# Altium PCB CruxOne_v1.2_with_silkscreen.PcbDoc
Units mm, origin at the board's own origin, x right, y up, seen from the top; angles counter-clockwise.
Board outline 45 x 20 mm, 4 copper layers (Top Layer, Mid-Layer 2, Mid-Layer 3, Bottom Layer); 87 components, 58 nets, 254 pads, 538 vias.
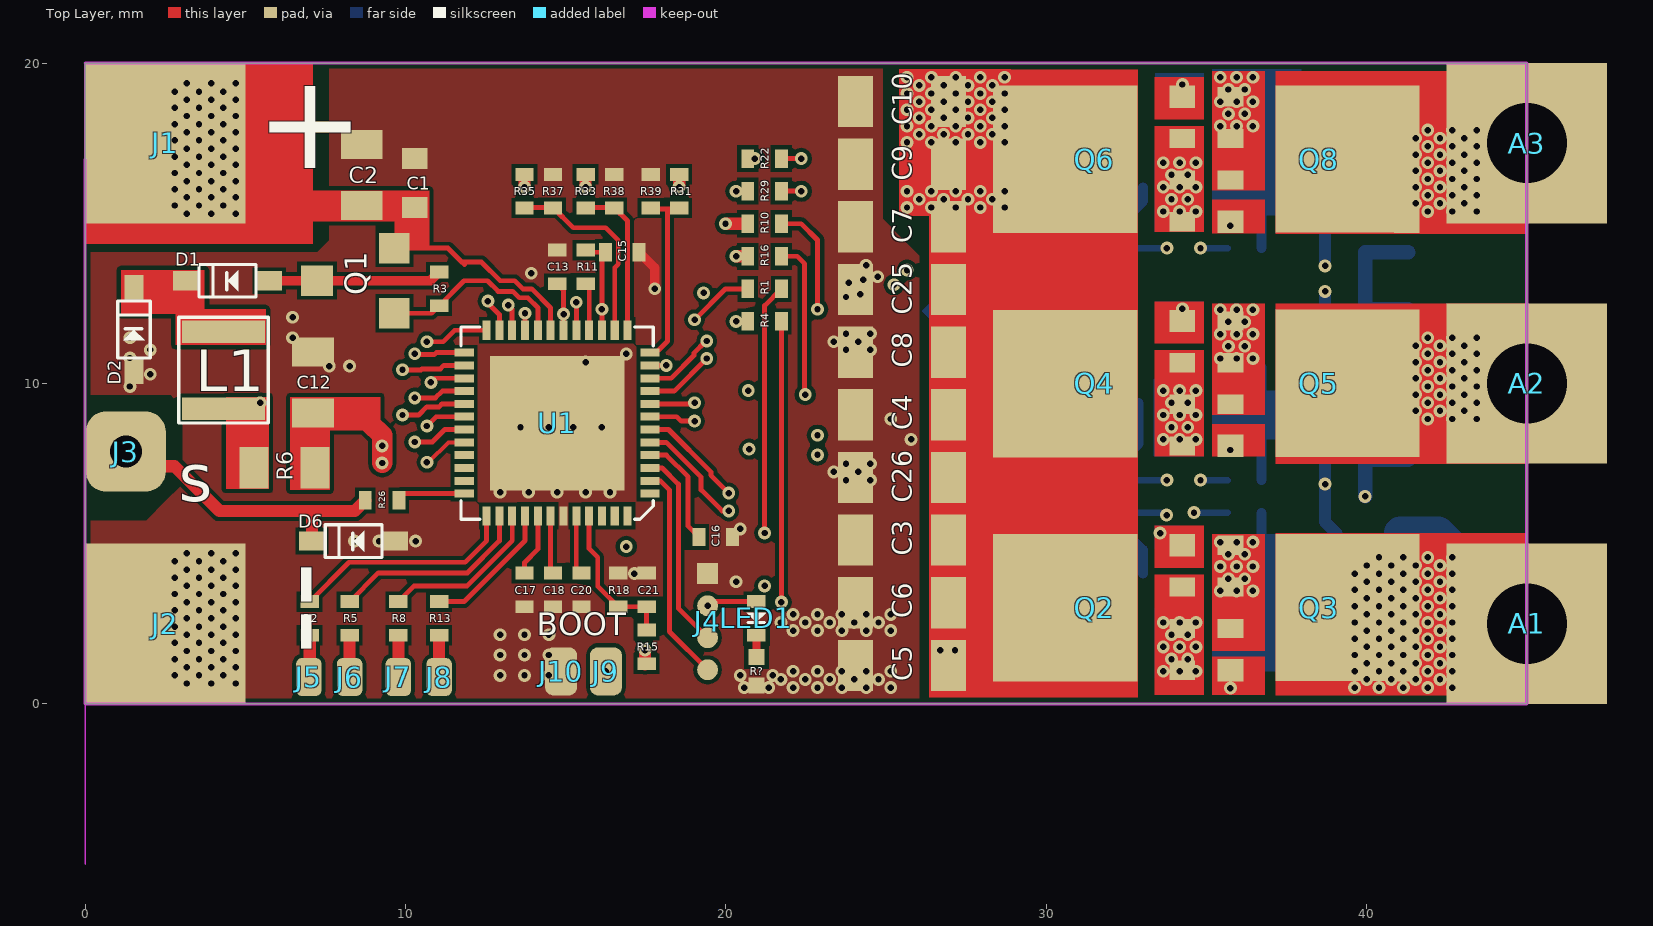
[diagram p0: Top Layer view]
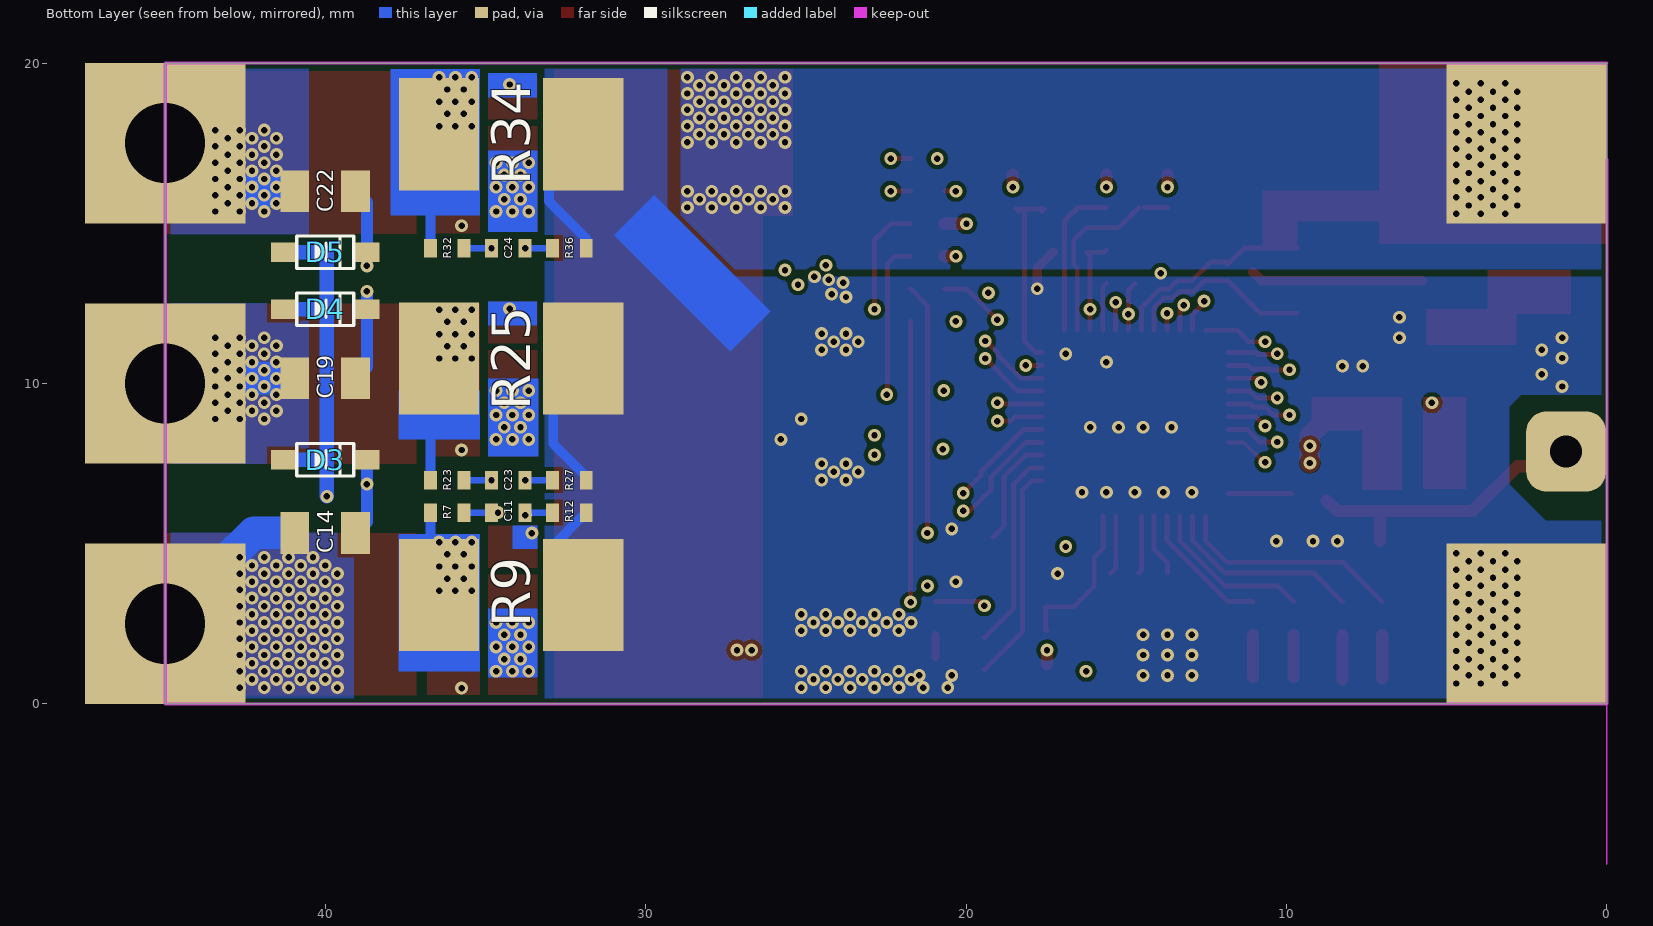
[diagram p1: Bottom Layer view, seen from below]
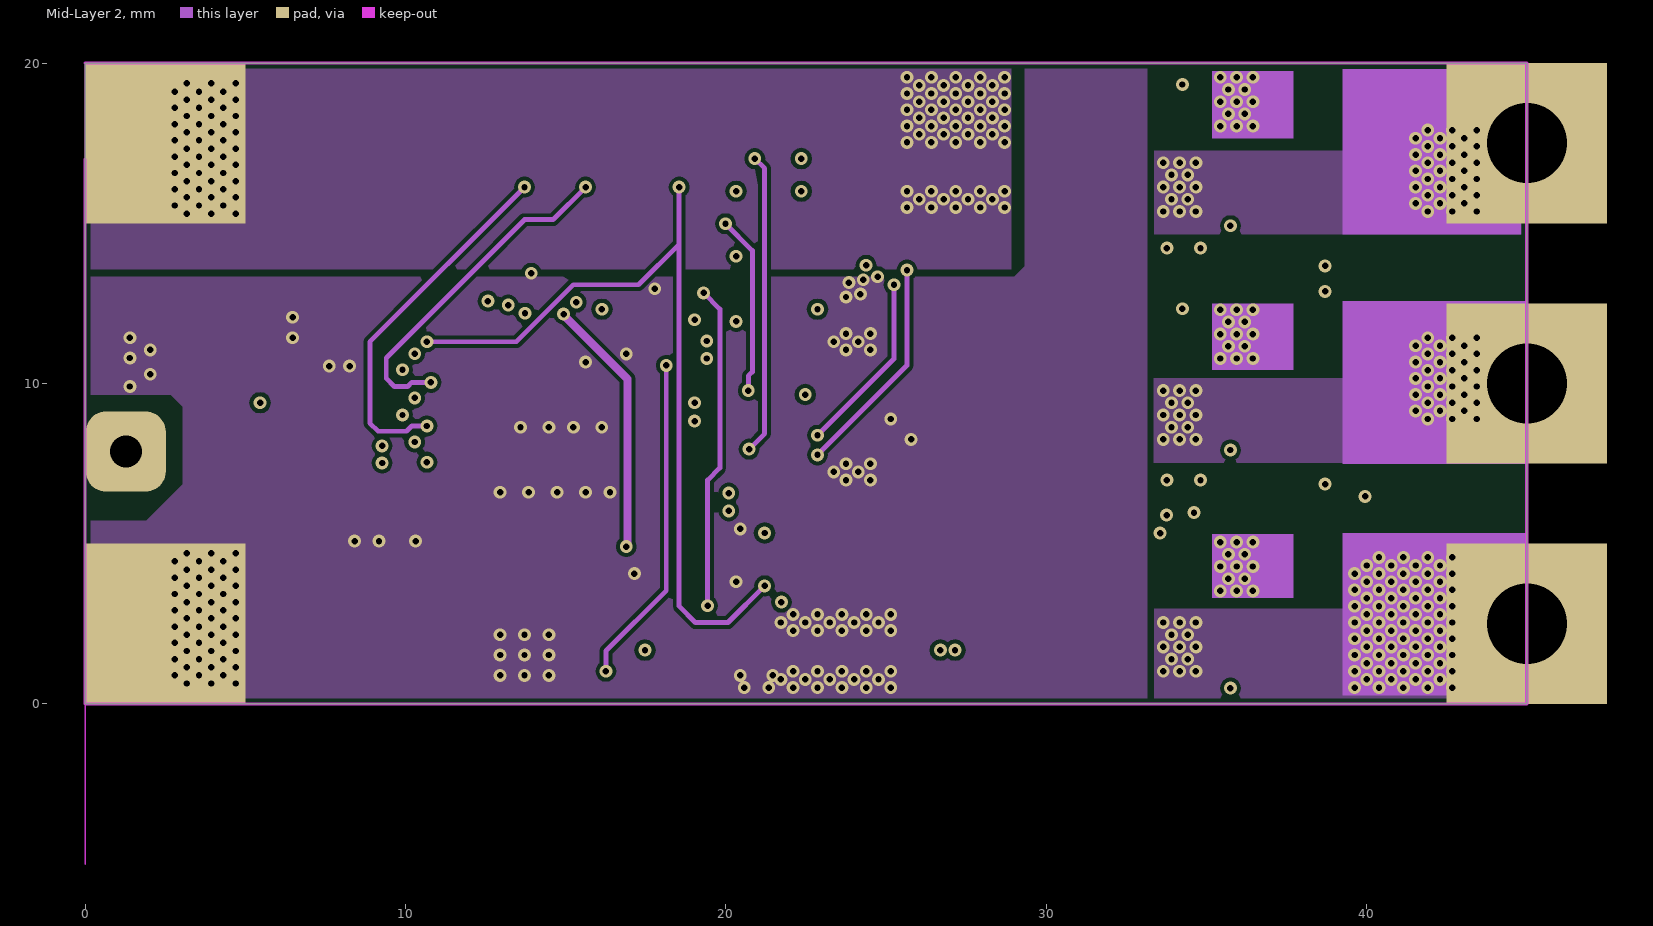
[diagram p2: Mid-Layer 2]
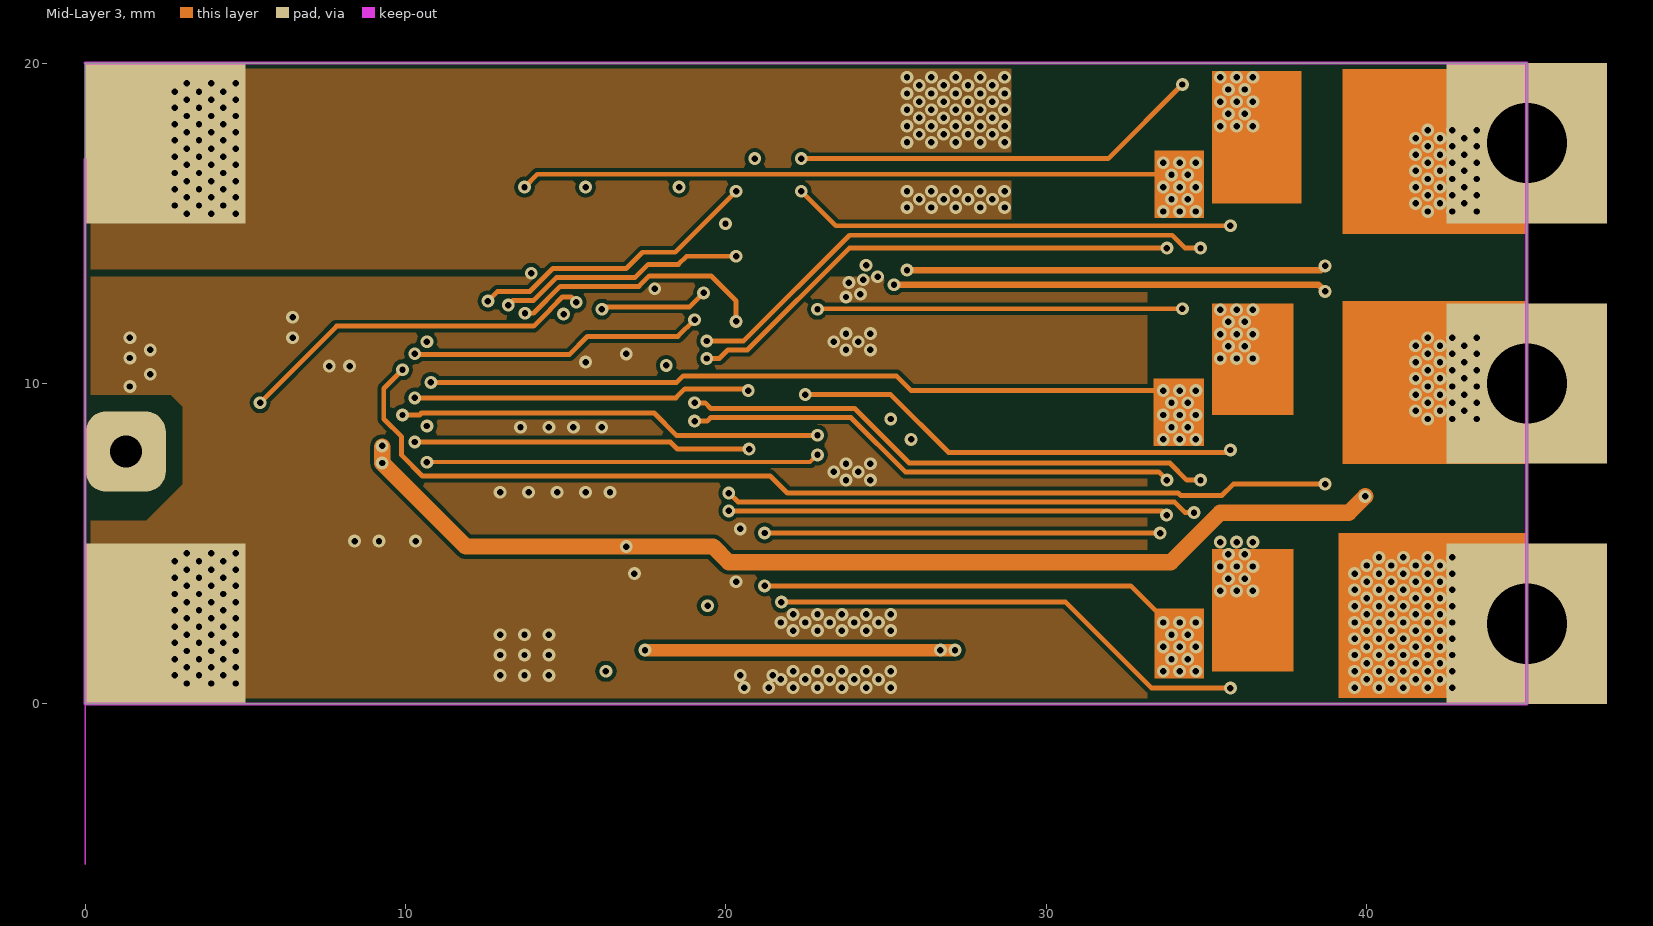
[diagram p3: Mid-Layer 3]

## Layer stack, top to bottom
Top Solder: solder mask 0.0102, Solder Resist, Dk 3.5
Top Layer: signal copper 0.0356
Dielectric1: core 0.32, FR-4, Dk 4.8
Mid-Layer 2: signal copper 0.0356
Dielectric2: prepreg 0.32, FR-4, Dk 4.8
Mid-Layer 3: signal copper 0.0356
Dielectric3: core 0.32, FR-4, Dk 4.8
Bottom Layer: signal copper 0.0356
Bottom Solder: solder mask 0.0102, Solder Resist, Dk 3.5

## Board outline
0,0 45,0 45,20 0,20

## Design rules (kind name [scope] priority, off if disabled: settings)
Clearance [All] p1: gap=0.127 ignorepadtopadclearanceinfootprint=FALSE except(0: Arc-Hole Track-Hole SMDPad-Hole THPad-Hole Via-Hole Fill-Hole Poly-Hole Region-Hole Text-Hole)
PlaneConnect [All] p1: planeconnectstyle=Direct reliefexpansion=0.508 reliefentries=4 reliefconductorwidth=0.254 reliefairgap=0.254
PolygonConnect [All] p1: connectstyle=Direct reliefconductorwidth=0.254 reliefentries=4 polygonreliefangle="90 Angle" airgapwidth=0.254
RoutingVias [All] p1: holewidth=0.711 width=1.27 viastyle="Through Hole" minholewidth=0.711 minwidth=1.27 maxholewidth=0.711 maxwidth=1.27
SilkToSolderMaskClearance SilkscreenOverComponentPads [IsPad] p1: minsilkscreentomaskgap=0.254 clearancetoexposedcopper=TRUE
SolderMaskExpansion [All] p1: expansion=0
Width [All] p1: maxlimit=1.27 minlimit=0.127 preferedwidth=0.203
28 further rules are at their usual default settings.

## Components (designator, comment, footprint, x,y, rotation, side; value= is the part's Value field where it differs from the comment)
A1 "" "PAD-1  4*3"#1 45,2.5 r90 top
A2 "" "PAD-1  4*3"#1 45,10 r90 top
A3 "" "PAD-1  4*3"#1 45,17.5 r90 top
C1 "0.1uF/25V" 0603-RES 10.287,16.256 r90 top
C2 "2.2uF/50V" 0805-RES 8.636,16.51 r90 top
C3 "22uF/35V" 1206-RES 25.5,5.111 r90 top
C4 "22uF/35V" 1206-RES 25.5,9.022 r90 top
C5 "22uF/35V" 1206-RES 25.5,1.2 r90 top
C6 "22uF/35V" 1206-RES 25.5,3.156 r90 top
C7 "22uF/35V" 1206-RES 25.5,14.889 r90 top
C8 "22uF/35V" 1206-RES 25.5,10.978 r90 top
C9 "22uF/35V" 1206-RES 25.5,16.844 r90 top
C10 "22uF/35V" 1206-RES 25.5,18.8 r90 top
C11 "332" 0402-RES 34.29,5.969 r180 bottom
C12 "10uF/25V" 0805-RES 7.112,10.033 r90 top
C13 "0.1uF/16V" 0402-RES 14.732,13.64 r90 top
C14 "1uF/25V" 0805-RES 40.005,5.334 r0 bottom
C15 "4.7uF/6.3V" 0402-RES 16.764,14.097 r180 top
C16 "2.2uF/6.3V" 0402-RES 19.685,5.207 r180 top
C17 "2.2uF/6.3V" 0402-RES 13.716,3.556 r90 top
C18 "2.2uF/6.3V" 0402-RES 14.605,3.556 r90 top
C19 "1uF/25V" 0805-RES 40.005,10.16 r0 bottom
C20 "4.7uF/6.3V" 0402-RES 15.494,3.556 r90 top
C21 "0.1uF/25V" 0402-RES 17.526,3.556 r90 top
C22 "1uF/25V" 0805-RES 40.005,16.002 r0 bottom
C23 "332" 0402-RES 34.29,6.985 r180 bottom
C24 "332" 0402-RES 34.29,14.224 r180 bottom
C25 "22uF/35V" 1206-RES 25.5,12.933 r90 top
C26 "22uF/35V" 1206-RES 25.5,7.067 r90 top
D1 "T4" SOD323 4.445,13.208 r0 top
D2 "T4" SOD323 1.524,11.684 r270 top
D3 "T4" SOD323 40.005,7.62 r0 bottom
D4 "T4" SOD323 40.005,12.319 r0 bottom
D5 "T4" SOD323 40.005,14.097 r0 bottom
D6 "3V3 TVS" SOD323 8.382,5.08 r0 top
J1 "BAT" "PAD-1  4*3"#2 2.5,17.5 r90 top
J2 "GND" "PAD-1  4*3"#2 2.5,2.5 r90 top
J3 "RC_IN" "PAD-1  2*1.5" 1.27,7.874 r180 top
J4 "SWD" 1.0-4p 19.431,4.064 r0 top
J5 "PAD" "PAD-1  0.8*1.2" 6.985,0.838 r270 top
J6 "PAD" "PAD-1  0.8*1.2" 8.255,0.838 r270 top
J7 "PAD" "PAD-1  0.8*1.2" 9.779,0.838 r90 top
J8 "PAD" "PAD-1  0.8*1.2" 11.049,0.838 r90 top
J9 "BOOT" "PAD-1  1*1.5" 16.256,1.016 r90 top
J10 "GND" "PAD-1  1*1.5" 14.859,1.016 r90 top
L1 "LCF1008-150K-T" LCF1008-RES 4.318,10.414 r90 top
LED1 "RED" 0402-LED 20.955,2.667 r270 top
Q1 "SI2308" SOT-23 9.652,12.192 r90 top
Q2 "NTMFS5C430NL" DFN5*6 31.5,3 r90 top
Q3 "NTMFS5C430NL" DFN5*6 38.5,3 r270 top
Q4 "NTMFS5C430NL" DFN5*6 31.5,10 r90 top
Q5 "NTMFS5C430NL" DFN5*6 38.5,10 r270 top
Q6 "NTMFS5C430NL" DFN5*6 31.5,17 r90 top
Q8 "NTMFS5C430NL" DFN5*6 38.5,17 r270 top
R1 "10R" 0402-RES 21.209,12.954 r0 top
R2 "100R" 0402-RES 7.01,2.667 r270 top
R3 "1K" 0402-RES 11.049,12.954 r90 top
R4 "10R" 0402-RES 21.209,11.938 r0 top
R5 "100R" 0402-RES 8.255,2.667 r270 top
R6 "0.33R" 0805-RES 6.223,7.366 r180 top
R7 "100R 1%" 0402-RES 36.195,5.969 r0 bottom
R8 "100R" 0402-RES 9.779,2.667 r270 top
R9 "0.001R" 2512-RES 34.2,3.396 r180 bottom
R10 "10R" 0402-RES 21.209,14.986 r0 top
R11 "51R" 0402-RES 15.621,13.64 r270 top
R12 "100R 1%" 0402-RES 32.385,5.969 r180 bottom
R13 "100R" 0402-RES 11.049,2.667 r270 top
R15 "47K" 0402-RES 17.526,1.778 r270 top
R16 "10R" 0402-RES 21.209,13.97 r0 top
R18 "2K" 0402-RES 16.637,3.556 r270 top
R22 "10R" 0402-RES 21.209,17.018 r0 top
R23 "100R 1%" 0402-RES 36.195,6.985 r0 bottom
R25 "0.001R" 2512-RES 34.2,10.777 r180 bottom
R26 "1K" 0402-RES 9.271,6.35 r180 top
R27 "100R 1%" 0402-RES 32.385,6.985 r180 bottom
R29 "10R" 0402-RES 21.209,16.002 r0 top
R31 "47K" 0402-RES 18.542,16.002 r90 top
R32 "100R 1%" 0402-RES 36.195,14.224 r0 bottom
R33 "47K" 0402-RES 15.621,16.002 r90 top
R34 "0.001R" 2512-RES 34.2,17.78 r180 bottom
R35 "47K" 0402-RES 13.716,16.002 r90 top
R36 "100R 1%" 0402-RES 32.385,14.224 r180 bottom
R37 "2K" 0402-RES 14.605,16.002 r270 top
R38 "2K" 0402-RES 16.51,16.002 r270 top
R39 "2K" 0402-RES 17.653,16.002 r270 top
R? "330R" 0402-CAP 20.955,1.016 r270 top
U1 "PCA5523" QFN48 14.732,8.763 r180 top

## Footprints (in the part's own frame and the unit in brackets; to place one, negate y for a bottom-side part, rotate by r counter-clockwise, add the part's x,y. Pads: shape width x height; smd on the part's side, far side on the other; paste and mask are expansions set on the pad)
1.0-4p [mm]
  rect 0.65x0.65 smd: 1(0,0)
  round 0.65 smd: 2(0,-1) 3(0,-2) 4(0,-3)
0402-CAP [mm]
  rect 0.5x0.5 smd: 1(-0.45,0) 2(0.45,0)
0402-LED [mm]
  rect 0.4x0.575 smd: 1(-0.525,0) 2(0.525,0)
  silkscreen extent -0.18,-0.3 0.13,0.3
0402-RES [mm]
  rect 0.4x0.575 smd: 1(-0.525,0) 2(0.525,0)
0603-RES [mm]
  rect 0.65x0.8 smd: 1(-0.762,0) 2(0.762,0)
0805-RES [mm]
  rect 0.9x1.3 smd: 1(-0.95,0) 2(0.95,0)
1206-RES [mm]
  rect 1.6x1.1 smd: 1(0,-1.45) 2(0,1.45)
2512-RES [mm]
  rect 2.5x3.5 smd mask+0: 1(-2.25,0) 2(2.25,0)
DFN5*6 [mm]
  rect 0.6x0.8 smd: 3(-1.95,-2.75) 3(-0.65,-2.75) 3(0.65,-2.75)
  rect 0.7x0.8 smd: 4(1.95,-2.75) 5(-1.95,2.75) 5(-0.65,2.75) 5(0.65,2.75) 5(1.95,2.75)
  rect 4.6x4.5 smd mask+0: 5(-0.006,0.908)
LCF1008-RES [mm]
  rect 0.7x2.6 smd: 1(-1.2,0) 2(1.2,0)
  silkscreen extent -1.65,-1.4 1.65,1.4
"PAD-1  0.8*1.2" [mm]
  rrect50% 1.2x0.8 smd: 1(0,0)
"PAD-1  1*1.5" [mm]
  rrect50% 1.5x1 smd: 1(0,0)
"PAD-1  2*1.5" [mm]
  rrect50% 2.5x2.5 hole 1: 1(0,0)
"PAD-1  4*3"#1 [mm]
  rect 5x5 hole 2.5: 1(0,0)
"PAD-1  4*3"#2 [mm]
  rect 5x5 all layers, no hole: 1(0,0)
QFN48 [mm]
  rect 4.2x4.2 smd: 0(0,0)
  rect 0.6x0.25 smd: 1(-2.9,2.2) 2(-2.9,1.8) 3(-2.9,1.4) 4(-2.9,1) 5(-2.9,0.6) 6(-2.9,0.2) 7(-2.9,-0.2) 8(-2.9,-0.6) 9(-2.9,-1) 10(-2.9,-1.4) 11(-2.9,-1.8) 12(-2.9,-2.2) 25(2.9,-2.2) 26(2.9,-1.8) 27(2.9,-1.4) 28(2.9,-1) 29(2.9,-0.6) 30(2.9,-0.2) 31(2.9,0.2) 32(2.9,0.6) 33(2.9,1) 34(2.9,1.4) 35(2.9,1.8) 36(2.9,2.2)
  rect 0.25x0.6 smd: 13(-2.2,-2.9) 14(-1.8,-2.9) 15(-1.4,-2.9) 16(-1,-2.9) 17(-0.6,-2.9) 18(-0.2,-2.9) 19(0.2,-2.9) 20(0.6,-2.9) 21(1,-2.9) 22(1.4,-2.9) 23(1.8,-2.9) 24(2.2,-2.9) 37(2.2,2.9) 38(1.8,2.9) 39(1.4,2.9) 40(1,2.9) 41(0.6,2.9) 42(0.2,2.9) 43(-0.2,2.9) 44(-0.6,2.9) 45(-1,2.9) 46(-1.4,2.9) 47(-1.8,2.9) 48(-2.2,2.9)
  silkscreen extent -3,-3 3,3
SOD323 [mm]
  rect 0.8x0.6 smd paste+0 mask+0: 1(1.3,0) 2(-1.3,0)
  silkscreen extent -0.89,-0.51 0.89,0.51
SOT-23 [mm]
  rect 0.95x0.95 smd: 1(0,0) 2(2.032,0)
  rect 0.95x1 smd: 3(1.016,2.413)

## Part data
A1 A2 A3 J1 J2 J3 J9 J10: library part PAD
C1 C2 C11 C12 C13 C14 C15 C16 C17 C18 C19 C20 C21 C22 C23 C24: library part Cap
C3 C4 C5 C6 C7 C8 C9 C10 C25 C26: library part C
D1 D2 D3 D4 D5 D6: library part Diode
J4: library part J_4P
L1 R1 R2 R3 R4 R5 R6 R7 R8 R9 R10 R11 R12 R13 R15 R16 R18 R22 R23 R25 R26 R27 R29 R31 R32 R33 R34 R35 R36 R37 R38 R39 R?: library part R
LED1: library part LED1
Q1: library part P-MOS
Q2 Q3 Q4 Q5 Q6 Q8: library part AON7418

## Via types
v1: diameter 0.4, hole 0.2, Top Layer to Bottom Layer, tented both sides, 538 vias

## Nets (pads, with @x,y where several pads share a name; then routed paths per layer and width w, separated by ;. In a path a pad name is that pad's centre, name@x,y a point inside that pad or via, vN(x,y) a via of type N, cw(c..) or ccw(c..) an arc to the next point about the centre after c; other vN are vias at no path point)
5V5: C15.2 J4.2 LED1.1 R11.1 U1.15 | length 18.3
  Top Layer w0.152: R11.1 15.689,14.097 C15.2 16.132,13.99 v1(16.132,12.319) U1.15 ; v1(19.431,3.064) 19.559,3.192 LED1.1
  Mid-Layer 2 w0.152: v1(19.304,12.827) 19.812,12.319 19.812,7.366 19.431,6.985 v1(19.431,3.064)
  Mid-Layer 3 w0.152: v1@16.18,12.271 v1(16.132,12.319) 16.205,12.392 18.869,12.392 v1(19.304,12.827)
A_DRV_HI: R1.1 U1.25 | length 13.1
  Top Layer w0.152: v1(10.287,10.928) 10.316,10.9 10.9,10.9 10.963,10.963 U1.25 ; v1(19.025,11.989) 19.99,12.954 R1.1 20.447,12.954
  Mid-Layer 3 w0.152: v1(10.287,10.928) 10.316,10.9 15.114,10.9 15.683,11.468 18.504,11.468 v1(19.025,11.989)
  Bottom Layer w0.152: v1(10.287,10.928) v1@10.316,10.9
A_DRV_LO: R4.1 U1.21 | length 8.6
  Top Layer w0.152: U1.21 v1(13.732,12.192)
  Mid-Layer 3 w0.152: v1(13.732,12.192) 13.995,12.192 14.833,13.03 17.286,13.03 17.613,13.357 19.536,13.357 20.32,12.573 v1(20.32,11.938)
B_DRV_HI: R10.1 U1.28 | length 18.6
  Top Layer w0.152: v1(10.287,9.55) 10.933,9.55 11.146,9.763 U1.28
  Top Layer w0.381: v1(19.99,14.986) R10.1
  Mid-Layer 2 w0.152: v1@19.917,14.913 v1(19.99,14.986) 20.828,14.148 20.828,10.363 20.701,10.236 v1(20.701,9.779)
  Mid-Layer 3 w0.152: v1(10.287,9.55) 18.44,9.55 18.72,9.83 v1@20.701,9.83
B_DRV_LO: R16.1 U1.22 | length 8.8
  Top Layer w0.152: v1@13.329,12.325 13.329,11.666 U1.22
  Top Layer w0.381: v1(20.32,13.97) R16.1
  Mid-Layer 3 w0.152: v1(13.208,12.446) 13.357,12.595 14.003,12.595 14.718,13.31 17.17,13.31 17.577,13.716 18.52,13.716 18.774,13.97 v1(20.32,13.97)
BAT_IN: C21.1 R15.1 R18.2 U1.45 | length 4.8
  Top Layer w0.152: U1.45 15.732,4.842 16.002,4.572 16.002,3.666 R18.2 C21.1 R15.1
C_DRV_HI: R22.1 U1.31 | length 21.6
  Top Layer w0.152: v1(10.287,8.172) 10.839,8.172 11.23,8.563 U1.31
  Mid-Layer 2 w0.152: v1(20.726,7.95) 21.209,8.433 21.209,16.713 v1(20.904,17.018)
  Mid-Layer 3 w0.152: v1(10.287,8.172) 18.269,8.172 18.491,7.95 v1(20.726,7.95)
C_DRV_LO: R29.1 U1.23 | length 10.5
  Top Layer w0.152: v1@12.573,12.511 12.932,12.152 U1.23 ; v1(20.32,16.002) R29.1
  Mid-Layer 3 w0.152: v1(12.573,12.573) 12.875,12.875 13.888,12.875 14.602,13.589 16.891,13.589 17.399,14.097 18.415,14.097 v1(20.32,16.002)
GND: C1.2 C2.2 C3.2 C4.2 C5.2 C6.2 C7.2 C8.2 C9.2 C10.2 C12.2 C13.2 C15.1 C16.1 C17.1 C18.1 C20.1 C21.2 C25.2 C26.2 D2.1 D6.1 J2.1 J4.1 J10.1 R9.2 R12.2 R18.1 R25.2 R27.2 R34.2 R36.2 R37.1 R38.1 R39.1 R?.2 U1.0 U1.43 | length 9.3
  Top Layer w0.3: C15.1 17.78,13.606 v1(17.78,12.954)
  Bottom Layer w0.3: R9.2@31.86,3.486 R9.2 ; R12.2 33.02,4.809 R9.2@33.02,4.064 ; R27.2 31.86,7.095 32.893,8.128 R25.2@32.893,9.398 ; R25.2@31.86,10.687 R25.2 ; R36.2 31.86,14.525 33.02,15.685 R34.2@33.02,16.129 ; R34.2@31.86,17.69 R34.2
  other v1: 20.574,0.508 21.336,0.508 22.098,0.508 22.86,0.508 23.622,0.508 24.384,0.508 25.146,0.508 3.175,0.635 3.937,0.635 4.699,0.635 21.717,0.762 22.479,0.762 23.241,0.762 24.003,0.762 24.765,0.762 2.794,0.889 3.556,0.889 4.318,0.889 12.954,0.889 13.716,0.889 14.478,0.889 20.447,0.889 21.463,0.889 22.098,1.016 22.86,1.016 23.622,1.016 24.384,1.016 25.146,1.016 3.175,1.143 3.937,1.143 4.699,1.143 2.794,1.397 3.556,1.397 4.318,1.397 12.954,1.524 13.716,1.524 14.478,1.524 3.175,1.651 3.937,1.651 4.699,1.651 2.794,1.905 3.556,1.905 4.318,1.905 3.175,2.159 3.937,2.159 4.699,2.159 12.954,2.159 13.716,2.159 14.478,2.159 22.098,2.286 22.86,2.286 23.622,2.286 24.384,2.286 25.146,2.286 2.794,2.413 3.556,2.413 4.318,2.413 21.717,2.54 22.479,2.54 23.241,2.54 24.003,2.54 24.765,2.54 3.175,2.667 3.937,2.667 4.699,2.667 22.098,2.794 22.86,2.794 23.622,2.794 24.384,2.794 25.146,2.794 2.794,2.921 3.556,2.921 4.318,2.921 3.175,3.175 3.937,3.175 4.699,3.175 2.794,3.429 3.556,3.429 4.318,3.429 3.175,3.683 3.937,3.683 4.699,3.683 20.32,3.81 2.794,3.937 3.556,3.937 4.318,3.937 17.145,4.064 3.175,4.191 3.937,4.191 4.699,4.191 2.794,4.445 3.556,4.445 4.318,4.445 3.175,4.699 3.937,4.699 4.699,4.699 8.412,5.08 9.174,5.08 10.317,5.08 20.447,5.461 12.954,6.604 13.843,6.604 14.732,6.604 15.621,6.604 16.383,6.604 23.749,6.985 24.511,6.985 23.368,7.239 24.13,7.239 23.749,7.493 24.511,7.493 25.781,8.255 13.589,8.636 14.478,8.636 15.24,8.636 16.129,8.636 25.146,8.89 1.397,9.906 2.032,10.287 7.62,10.541 8.255,10.541 15.621,10.668 1.397,10.795 16.891,10.922 2.032,11.049 23.749,11.049 24.511,11.049 23.368,11.303 24.13,11.303 1.397,11.43 6.477,11.43 23.749,11.557 24.511,11.557 6.477,12.065 23.749,12.7 24.198,12.79 23.839,13.149 24.288,13.239 24.737,13.329 13.923,13.442 24.378,13.688
IA_A: C11.1 R7.1 U1.6 | length 18.9
  Top Layer w0.152: U1.6 18.161,8.563 ; 18.209,8.563 19.533,7.239 19.533,7.137 v1(20.091,6.579)
  Mid-Layer 3 w0.152: v1(20.091,6.579) 20.103,6.579 20.379,6.302 34.002,6.302 34.335,5.969 v1(34.612,5.969)
  Bottom Layer w0.203: C11.1 R7.1
IA_B: C11.2 R12.1 U1.5 | length 18.2
  Top Layer w0.152: U1.5 18.14,8.163 19.228,7.075 19.228,6.68 19.885,6.023 v1(20.088,6.023)
  Mid-Layer 3 w0.152: v1(20.088,6.023) 33.626,6.023 v1(33.757,5.893)
  Bottom Layer w0.203: R12.1 C11.2 33.757,5.961 v1(33.757,5.893)
IB_A: C23.1 R23.1 U1.8 | length 19.1
  Top Layer w0.152: U1.8 18.991,9.363 v1(19.025,9.396)
  Mid-Layer 3 w0.152: v1(19.025,9.396) 19.356,9.396 19.534,9.219 24.019,9.219 25.719,7.518 33.858,7.518 34.392,6.985 v1(34.815,6.985)
  Bottom Layer w0.203: v1(34.815,6.985) R23.1
IB_B: C23.2 R27.1 U1.7 | length 17.9
  Top Layer w0.152: U1.7 18.469,8.963 18.607,8.825 v1(19.025,8.825)
  Mid-Layer 3 w0.152: v1(19.025,8.825) 19.419,8.825 19.533,8.939 23.903,8.939 25.603,7.239 33.511,7.239 v1(33.765,6.985)
  Bottom Layer w0.203: R27.1 v1(33.765,6.985)
IC_A: C24.1 R32.1 U1.10 | length 20.4
  Top Layer w0.152: 17.944,10.163 U1.10 18.291,10.163 19.002,10.874 19.002,10.947 19.381,11.326 v1(19.406,11.326)
  Mid-Layer 3 w0.152: v1(19.406,11.326) 19.408,11.328 20.56,11.328 23.859,14.627 33.932,14.627 34.335,14.224 v1(34.815,14.224)
  Bottom Layer w0.203: v1(34.815,14.224) R32.1
IC_B: C24.2 R36.1 U1.9 | length 18.9
  Top Layer w0.152: U1.9 18.388,9.763 v1(19.406,10.78)
  Mid-Layer 3 w0.152: v1@19.34,10.78 v1@19.373,10.813 ; v1(19.406,10.78) 19.797,10.78 20.066,11.049 20.676,11.049 23.851,14.224 v1(33.765,14.224)
  Bottom Layer w0.203: R36.1 v1(33.765,14.224)
NetC14_1: C14.1 D3.2 U1.26 | length 37.1
  Top Layer w0.152: v1(9.906,10.427) 10.483,10.427 10.511,10.455 11.09,10.455 11.198,10.563 U1.26
  Mid-Layer 3 w0.152: v1@9.916,10.436 v1(9.906,10.427) 9.322,9.842 9.322,8.89 9.881,8.331 9.881,7.761 10.53,7.112 21.387,7.112 21.917,6.582 34.118,6.582 34.197,6.502 35.484,6.502 35.839,6.858 v1(38.705,6.858)
  Bottom Layer w0.381: D3.2 v1(38.705,6.858) 38.705,5.684 C14.1
NetC16_2: C16.2 U1.4 | length 3.5
  Top Layer w0.152: U1.4 18.145,7.763 18.821,7.087 18.821,5.935 18.821,5.546 C16.2
NetC17_2: C17.2 U1.41 | length 2
  Top Layer w0.152: C17.2 13.716,4.41 14.132,4.826 14.132,5.207 U1.41
NetC18_2: C18.2 U1.42 | length 1.8
  Top Layer w0.152: U1.42 14.532,4.154 C18.2
NetC19_1: C19.1 D4.2 U1.29 | length 37.4
  Top Layer w0.152: v1(9.906,9.017) 10.414,9.017 10.668,9.271 11.049,9.271 11.141,9.363 U1.29
  Mid-Layer 2 w0.152: v1(22.86,8.382) 25.248,10.77 v1(25.248,13.081)
  Mid-Layer 3 w0.152: v1(9.906,9.017) 10.441,9.017 10.501,9.077 17.759,9.077 18.455,8.382 v1(22.86,8.382)
  Mid-Layer 3 w0.203: v1(25.248,13.081) 38.497,13.081 v1(38.705,12.873)
  Bottom Layer w0.381: v1(38.705,12.873) D4.2 38.705,10.51 C19.1
NetC20_2: C20.2 U1.44 | length 1.8
  Top Layer w0.152: U1.44 15.332,4.243 C20.2
NetC22_1: C22.1 D5.2 U1.32 | length 36
  Top Layer w0.127: v1(10.668,7.544) 10.719,7.544 11.338,8.163 U1.32
  Mid-Layer 2 w0.152: v1(22.86,7.772) 25.654,10.566 v1(25.654,13.538)
  Mid-Layer 3 w0.127: v1(10.668,7.544) 22.631,7.544 v1(22.86,7.772)
  Mid-Layer 3 w0.203: v1(25.654,13.538) v1@38.573,13.538
  Bottom Layer w0.381: v1(38.705,13.67) D5.2 38.705,15.652 C22.1
NetD1_1: D1.1 Q1.3 R3.2 | length 5.4
  Top Layer w0.305: D1.1 Q1.3 10.778,13.208 R3.2
NetD1_2: D1.2 D2.2 L1.2
NetD6_2: D6.2 J3.1 R26.2 | length 9.3
  Top Layer w0.152: J3.1 J3.1@1.727,7.417
  Top Layer w0.381: J3.1@1.727,7.417 2.794,7.417 4.191,6.02 7.052,6.02 ; D6.2 7.082,5.99 7.052,6.02 ; R26.2 8.416,6.02 7.052,6.02
NetJ5_1: J5.1 R2.2 | length 1.4
  Top Layer w0.381: J5.1@7.01,0.787 R2.2
NetJ6_1: J6.1 R5.2 | length 1.4
  Top Layer w0.381: J6.1@8.255,0.762 R5.2
NetJ7_1: J7.1 R8.2 | length 1.3
  Top Layer w0.381: J7.1 R8.2
NetJ8_1: J8.1 R13.2 | length 1.3
  Top Layer w0.381: J8.1 R13.2
NetJ9_1: J9.1 U1.11 | length 10.8
  Top Layer w0.152: U1.11 v1(18.139,10.563)
  Mid-Layer 2 w0.152: v1(16.256,1.016) 16.256,1.651 18.139,3.534 v1(18.139,10.563)
NetL1_1: L1.1 R6.2 U1.17 | length 12.6
  Top Layer w0.152: U1.17 15.338,11.669 15.338,12.532 v1(15.332,12.538)
  Mid-Layer 3 w0.152: v1(5.461,9.398) 7.366,11.303 ; 7.62,11.557 7.366,11.303 ; v1(15.332,12.538) 15.17,12.7 14.898,12.7 14.532,12.334 14.532,12.319 14.002,11.789 7.852,11.789 7.366,11.303
NetLED1_2: LED1.2 R?.1 | length 0.7
  Top Layer w0.254: R?.1 LED1.2
NetQ1_1: Q1.1 R3.1 U1.20 | length 6
  Top Layer w0.152: Q1.1 10.812,12.192 R3.1 11.828,13.208 12.559,13.208 12.892,12.875 13.273,12.875 13.35,12.875 13.55,12.675 13.82,12.675 14.135,12.359 14.135,11.666 U1.20
NetQ2_4: Q2.4 R1.2 | length 21.1
  Top Layer w0.152: v1(21.209,5.334) 21.209,12.429 R1.2
  Mid-Layer 3 w0.152: v1(21.209,5.334) 21.212,5.331 23.495,5.331 ; 22.603,5.331 23.495,5.331 ; v1(33.553,5.331) 23.495,5.331
NetQ3_3: Q3.3 R7.2 R9.1 | length 2.7
  Bottom Layer w0.3: R9.1 36.72,3.666 R7.2
  other v1: 35.433,3.526 35.941,3.526 36.449,3.526 35.687,3.907 36.195,3.907 35.433,4.288 35.941,4.288 36.449,4.288 35.687,4.669 36.195,4.669 35.433,5.05 35.941,5.05 36.449,5.05
NetQ3_4: Q3.4 R4.2 | length 23.9
  Top Layer w0.152: v1(21.734,3.175) R4.2
  Mid-Layer 3 w0.152: v1(21.734,3.175) 30.607,3.175 33.291,0.491 v1(35.75,0.491)
NetQ4_4: Q4.4 R10.2 | length 14.9
  Top Layer w0.152: R10.2 22.352,14.986 22.86,14.478 v1(22.86,12.319)
  Mid-Layer 3 w0.152: v1(22.86,12.319) 22.872,12.331 27.508,12.331 v1(34.25,12.331)
NetQ5_3: Q5.3 R23.2 R25.1 | length 3.9
  Bottom Layer w0.3: R25.1 36.72,10.507 R23.2
  other v1: 35.433,10.78 35.941,10.78 36.449,10.78 35.687,11.161 36.195,11.161 35.433,11.542 35.941,11.542 36.449,11.542 35.687,11.923 36.195,11.923 35.433,12.304 35.941,12.304 36.449,12.304
NetQ5_4: Q5.4 R16.2 | length 19
  Top Layer w0.152: R16.2 22.225,13.97 22.457,13.738 22.457,9.674 v1(22.479,9.652)
  Mid-Layer 3 w0.152: v1(22.479,9.652) 25.146,9.652 26.951,7.847 35.674,7.847 v1(35.75,7.923)
NetQ6_4: Q6.4 R22.2 | length 13.5
  Top Layer w0.152: R22.2 v1(22.352,17.018)
  Mid-Layer 3 w0.152: v1(22.352,17.018) 31.937,17.018 v1(34.25,19.331)
NetQ8_3: Q8.3 R32.2 R34.1 | length 3.7
  Bottom Layer w0.3: R34.1 36.72,17.51 R32.2
  other v1: 35.433,18.034 35.941,18.034 36.449,18.034 35.687,18.415 36.195,18.415 35.433,18.796 35.941,18.796 36.449,18.796 35.687,19.177 36.195,19.177 35.433,19.558 35.941,19.558 36.449,19.558
NetQ8_4: Q8.4 R29.2 | length 14.5
  Top Layer w0.152: R29.2 v1(22.352,16.002)
  Mid-Layer 3 w0.152: v1(22.352,16.002) 23.431,14.923 v1(35.75,14.923)
NetR11_2: R11.2 U1.16 | length 1.5
  Top Layer w0.152: R11.2 15.735,13.001 15.735,11.666 U1.16
NetR26_1: R26.1 U1.36 | length 2
  Top Layer w0.152: R26.1@9.837,6.563 U1.36
NetR31_1: R31.1 R39.2 U1.12 | length 6
  Top Layer w0.152: U1.12 17.821,10.963 18.183,11.325 18.183,15.429 18.161,15.452 ; R39.2@17.632,15.371 17.551,15.452 R39.2@17.678,15.452 ; R39.2 R39.2@17.678,15.452 ; R31.1@18.36,15.371 18.44,15.452 18.161,15.452 ; R39.2@17.678,15.452 18.161,15.452
NetR33_1: R33.1 R38.2 U1.13 | length 4.9
  Top Layer w0.152: R33.1@15.621,15.494 16.51,15.494 16.932,15.072 U1.13
NetR35_1: R35.1 R37.2 U1.14 | length 6
  Top Layer w0.152: R35.1@13.716,15.494 R37.2@14.427,15.494 ; R37.2@14.605,15.494 15.24,14.859 16.252,14.859 16.642,14.469 16.642,13.725 16.532,13.615 U1.14
OUTA: A1.1 C14.2 Q2.3 Q3.5 R31.2 U1.24 | length 44.4
  Top Layer w0.152: v1(10.668,11.303) 11.176,11.303 11.536,11.663 U1.24
  Top Layer w0.381: v1(18.542,16.129) R31.2
  Mid-Layer 2 w0.152: v1(10.668,11.303) 13.462,11.303 15.24,13.081 17.272,13.081 18.542,14.351 ; v1(18.542,16.129) 18.542,14.351 ; v1(21.209,3.683) 20.066,2.54 19.05,2.54 18.542,3.048 18.542,4.191 18.542,14.351
  Mid-Layer 3 w0.152: v1(21.209,3.683) 32.639,3.683 33.528,2.794
  Bottom Layer w0.457: C14.2 42.164,5.334
  Bottom Layer w1.016: C14.2@41.057,5.334 42.24,5.334 A1.1@43.155,4.42
  other v1: 39.624,0.508 40.386,0.508 41.148,0.508 41.91,0.508 42.672,0.508 40.005,0.762 40.767,0.762 41.529,0.762 42.291,0.762 33.655,1.016 34.163,1.016 34.671,1.016 39.624,1.016 40.386,1.016 41.148,1.016 41.91,1.016 42.672,1.016 40.005,1.27 40.767,1.27 41.529,1.27 42.291,1.27 33.909,1.397 34.417,1.397 39.624,1.524 40.386,1.524 41.148,1.524 41.91,1.524 42.672,1.524 33.655,1.778 34.163,1.778 34.671,1.778 40.005,1.778 40.767,1.778 41.529,1.778 42.291,1.778 39.624,2.032 40.386,2.032 41.148,2.032 41.91,2.032 42.672,2.032 33.909,2.159 34.417,2.159 40.005,2.286 40.767,2.286 41.529,2.286 42.291,2.286 33.655,2.54 34.163,2.54 34.671,2.54 39.624,2.54 40.386,2.54 41.148,2.54 41.91,2.54 42.672,2.54 40.005,2.794 40.767,2.794 41.529,2.794 42.291,2.794 39.624,3.048 40.386,3.048 41.148,3.048 41.91,3.048 42.672,3.048 40.005,3.302 40.767,3.302 41.529,3.302 42.291,3.302 39.624,3.556 40.386,3.556 41.148,3.556 41.91,3.556 42.672,3.556 40.005,3.81 40.767,3.81 41.529,3.81 42.291,3.81 39.624,4.064 40.386,4.064 41.148,4.064 41.91,4.064 42.672,4.064 40.005,4.318 40.767,4.318 41.529,4.318 42.291,4.318 40.386,4.572 41.148,4.572 41.91,4.572 42.672,4.572
OUTB: A2.1 C19.2 Q4.3 Q5.5 R33.2 U1.27 | length 37.1
  Top Layer w0.152: v1@10.925,10.163 U1.27
  Top Layer w0.381: v1(15.621,16.129) R33.2
  Mid-Layer 2 w0.152: v1(10.795,10.033) 10.199,10.033 10.072,9.906 9.652,9.906 9.398,10.16 9.398,10.795 13.716,15.113 14.605,15.113 v1(15.621,16.129)
  Mid-Layer 3 w0.152: v1(10.795,10.033) 18.466,10.033 18.669,10.236 25.324,10.236 25.781,9.779 v1(33.655,9.779)
  Bottom Layer w1.016: C19.2@41.057,10.16 A2.1@43.078,10.16
  other v1: 33.655,8.255 34.163,8.255 34.671,8.255 33.909,8.636 34.417,8.636 41.91,8.89 42.672,8.89 43.434,8.89 33.655,9.017 34.163,9.017 34.671,9.017 41.529,9.144 42.291,9.144 43.053,9.144 33.909,9.398 34.417,9.398 41.91,9.398 42.672,9.398 43.434,9.398 41.529,9.652 42.291,9.652 43.053,9.652 34.163,9.779 34.671,9.779 41.91,9.906 42.672,9.906 43.434,9.906 41.529,10.16 42.291,10.16 43.053,10.16 41.91,10.414 42.672,10.414 43.434,10.414 41.529,10.668 42.291,10.668 43.053,10.668 41.91,10.922 42.672,10.922 43.434,10.922 41.529,11.176 42.291,11.176 43.053,11.176 41.91,11.43 42.672,11.43 43.434,11.43
OUTC: A3.1 C22.2 Q6.3 Q8.5 R35.2 U1.30 | length 35.4
  Top Layer w0.152: v1(10.668,8.674) 10.957,8.963 U1.30
  Top Layer w0.381: v1(13.716,16.129) R35.2
  Mid-Layer 2 w0.152: v1(10.668,8.674) 10.198,8.674 10.033,8.509 9.144,8.509 8.89,8.763 8.89,11.303 v1(13.716,16.129)
  Mid-Layer 3 w0.152: v1(13.716,16.129) 14.119,16.532 33.684,16.532 ; 33.684,16.51 v1(33.909,16.51)
  Bottom Layer w1.016: C22.2@41.057,16.002 A3.1@43.078,16.002
  other v1: 33.655,15.367 34.163,15.367 34.671,15.367 41.91,15.367 42.672,15.367 43.434,15.367 41.529,15.621 42.291,15.621 43.053,15.621 33.909,15.748 34.417,15.748 41.91,15.875 42.672,15.875 43.434,15.875 33.655,16.129 34.163,16.129 34.671,16.129 41.529,16.129 42.291,16.129 43.053,16.129 41.91,16.383 42.672,16.383 43.434,16.383 34.417,16.51 41.529,16.637 42.291,16.637 43.053,16.637 33.655,16.891 34.163,16.891 34.671,16.891 41.91,16.891 42.672,16.891 43.434,16.891 41.529,17.145 42.291,17.145 43.053,17.145 41.91,17.399 42.672,17.399 43.434,17.399 41.529,17.653 42.291,17.653 43.053,17.653 41.91,17.907 42.672,17.907 43.434,17.907
PE0: R2.1 U1.37 | length 7.1
  Top Layer w0.152: R2.1 8.238,4.42 11.862,4.42 12.532,5.09 U1.37
PE1: R5.1 U1.38 | length 6.2
  Top Layer w0.152: R5.1 9.152,4.089 11.935,4.089 12.932,5.086 U1.38
PE2: R8.1 U1.39 | length 5.1
  Top Layer w0.152: R8.1 10.27,3.683 11.924,3.683 13.332,5.091 U1.39
PE3: R13.1 U1.40 | length 4.2
  Top Layer w0.152: R13.1 11.828,3.192 13.732,5.096 U1.40
SWCLK: J4.3 U1.3 | length 6.3
  Top Layer w0.152: U1.3 18.012,7.363 18.517,6.858 18.517,2.978 J4.3
SWDIO: J4.4 U1.2 | length 6.8
  Top Layer w0.152: U1.2 17.954,6.963 18.237,6.68 18.237,2.258 J4.4
VCC_IN: C1.1 C2.1 C3.1 C4.1 C5.1 C6.1 C7.1 C8.1 C9.1 C10.1 C25.1 C26.1 J1.1 Q1.2 Q2.5 Q4.5 Q6.5 R15.2 U1.19 | length 16.6
  Top Layer w0.152: Q1.2 11.328,14.224 11.76,13.792 ; 11.836,13.716 11.76,13.792 ; U1.19 14.532,12.357 13.935,12.954 13.665,12.954 13.411,13.208 12.954,13.208 12.37,13.792 11.76,13.792
  Top Layer w0.381: R15.2@17.475,1.236 v1(17.475,1.676)
  Mid-Layer 3 w0.381: v1(17.475,1.676) v1(27.153,1.676)
  other v1: 26.695,1.676 3.175,15.301 3.937,15.301 4.699,15.301 25.654,15.494 26.416,15.494 27.178,15.494 27.94,15.494 28.702,15.494 2.794,15.555 3.556,15.555 4.318,15.555 26.035,15.748 26.797,15.748 27.559,15.748 28.321,15.748 3.175,15.809 3.937,15.809 4.699,15.809 25.654,16.002 26.416,16.002 27.178,16.002 27.94,16.002 28.702,16.002 2.794,16.063 3.556,16.063 4.318,16.063 3.175,16.317 3.937,16.317 4.699,16.317 2.794,16.571 3.556,16.571 4.318,16.571 3.175,16.825 3.937,16.825 4.699,16.825 2.794,17.079 3.556,17.079 4.318,17.079 3.175,17.333 3.937,17.333 4.699,17.333 25.654,17.526 26.416,17.526 27.178,17.526 27.94,17.526 28.702,17.526 2.794,17.587 3.556,17.587 4.318,17.587 26.035,17.78 26.797,17.78 27.559,17.78 28.321,17.78 3.175,17.841 3.937,17.841 4.699,17.841 25.654,18.034 26.416,18.034 27.178,18.034 27.94,18.034 28.702,18.034 2.794,18.095 3.556,18.095 4.318,18.095 26.035,18.288 26.797,18.288 27.559,18.288 28.321,18.288 3.175,18.349 3.937,18.349 4.699,18.349 25.654,18.542 26.416,18.542 27.178,18.542 27.94,18.542 28.702,18.542 2.794,18.603 3.556,18.603 4.318,18.603 26.035,18.796 26.797,18.796 27.559,18.796 28.321,18.796 3.175,18.857 3.937,18.857 4.699,18.857 25.654,19.05 26.416,19.05 27.178,19.05 27.94,19.05 28.702,19.05 2.794,19.111 3.556,19.111 4.318,19.111 26.035,19.304 26.797,19.304 27.559,19.304 28.321,19.304 3.175,19.365 3.937,19.365 4.699,19.365 25.654,19.558 26.416,19.558 27.178,19.558 27.94,19.558 28.702,19.558
VP: C12.1 C13.1 D3.1 D4.1 D5.1 R6.1 U1.18 | length 56
  Top Layer w0.152: C13.1 14.929,12.918 14.929,12.173 v1(14.935,12.167) 14.932,12.163 U1.18
  Top Layer w0.635: 8.89,8.763 9.271,8.382 v1(9.271,8.052) v1(9.271,7.518)
  Mid-Layer 2 w0.254: v1(14.935,12.167) 14.935,12.141 14.932,12.138 16.932,10.138 v1@16.932,4.95
  Mid-Layer 3 w0.508: v1@9.271,8.026 v1(9.271,7.518) 11.88,4.909 v1(16.891,4.909) 19.602,4.909 20.091,4.42 33.884,4.42 35.433,5.969 39.446,5.969 v1(39.954,6.477)
  Bottom Layer w0.457: v1(39.954,6.477) 39.954,7.62 ; D3.1 39.954,7.62 ; D4.1 39.954,12.319 ; D5.1 39.954,14.097 39.954,12.319 ; 39.954,7.62 39.954,12.319
pads on no net: U1.1 U1.33 U1.34 U1.35 U1.46 U1.47 U1.48

## Polygon pours and split planes (outlines as drawn)
GND on Mid-Layer 2 "Mid-Layer 2-No Net 1" (solid, remove dead copper, pour order 1015): 33.147,20 33.147,0 0,0 0,5.715 1.905,5.715 3.048,6.858 3.048,9.271 2.667,9.652 0,9.652 0,13.335 29.007,13.335 29.21,13.538 29.337,13.665 29.337,20
VCC_IN on Mid-Layer 2 "Mid-Layer 2-No Net 1" (solid, remove dead copper, pour order 1019): 0,20 0,13.564 0.178,13.564 28.905,13.564 28.905,20
OUTC on Mid-Layer 2 "Mid-Layer 2-No Net 1" (solid, remove dead copper, pour order 1018): 33.376,17.272 33.376,14.656 45,14.656 45,17.272 33.376,17.272
OUTB on Mid-Layer 2 "Mid-Layer 2-No Net 1" (solid, remove dead copper, pour order 1017): 33.35,10.16 33.35,7.518 45,7.518 45,10.16 33.35,10.16
OUTA on Mid-Layer 2 "Mid-Layer 2-No Net 1" (solid, remove dead copper, pour order 1016): 33.376,2.769 33.376,0 34.112,0 45,0 45,1.626 45,2.972 33.376,2.972
GND on Mid-Layer 3 "Mid-Layer 2-No Net 1" (solid, remove dead copper, pour order 1021): 33.147,20 33.147,0 0,0 0,5.715 1.905,5.715 3.048,6.858 3.048,9.271 2.667,9.652 0,9.652 0,13.335 29.007,13.335 29.21,13.538 29.337,13.665 29.337,20
VCC_IN on Mid-Layer 3 "Mid-Layer 2-No Net 1" (solid, remove dead copper, pour order 1020): 0,20 0,13.564 0.178,13.564 28.905,13.564 28.905,20
GND on Bottom Layer "Mid-Layer 2-No Net 1" (solid, remove dead copper, pour order 1023): 33.147,20 33.147,0 0,0 0,5.715 1.905,5.715 3.048,6.858 3.048,9.271 2.667,9.652 0,9.652 0,13.335 29.007,13.335 29.21,13.538 29.337,13.665 29.337,20
OUTC on Bottom Layer "Mid-Layer 2-No Net 1" (solid, remove dead copper, pour order 1026): 45,20 40.513,20 40.513,16.51 40.513,14.656 44.82,14.656
OUTB on Bottom Layer "Mid-Layer 2-No Net 1" (solid, remove dead copper, pour order 1025): 45,12.497 40.513,12.497 40.513,8.763 40.513,7.493 45,7.493
OUTA on Bottom Layer "Mid-Layer 2-No Net 1" (solid, remove dead copper, pour order 1024): 39.116,0 39.116,5.334 45,5.334 45,0
VCC_IN on Bottom Layer "Mid-Layer 2-No Net 1" (solid, remove dead copper, pour order 1022): 0,20 0,13.564 0.178,13.564 28.905,13.564 28.905,20
GND on Top Layer "Mid-Layer 2-No Net 1" (solid, remove dead copper, pour order 1027): 24.892,20 24.892,15.135 25.4,14.627 26.035,13.992 26.035,0 0,0 0,5.715 1.905,5.715 2.54,6.35 3.048,6.858 3.048,9.017 3.048,9.271 2.667,9.652 0,9.652 0,14.097 7.239,14.097 7.366,14.224 7.62,14.478 7.62,20

## Keep-outs
Keep-Out Layer:
  lines w0.05: 0,-5 0,0 ; 0,17 0,20
  lines w0.1: 0,17 0,0 45,0 45,20 0,20
  text "FR-4 2.0MM 蓝油白字沉金" at 7.366,-3.302 h1.5

## Other copper
Top Layer:
  rectangle net VCC_IN: 25.4,15.222 28.905,19.812
  rectangle net VCC_IN: 0,14.351 7.112,20
  rectangle net VCC_IN: 26.34,0.203 32.868,19.797
  rectangle net NetQ6_4: 33.376,18.242 34.925,19.563
  rectangle net NetQ4_4: 33.376,11.242 34.925,12.563
  rectangle net NetQ2_4: 33.376,4.242 34.925,5.563
  rectangle net OUTC: 33.376,14.722 34.925,18.039
  rectangle net NetQ8_3: 35.179,16.017 36.83,19.761
  rectangle net NetQ8_4: 35.179,14.681 36.822,15.748
  rectangle net NetQ5_4: 35.179,7.722 36.83,8.738
  rectangle net OUTB: 33.376,7.722 34.925,11.039
  rectangle net NetQ5_3: 35.179,9.017 36.83,12.497
  rectangle net OUTB: 37.16,7.493 45,12.497
  rectangle net OUTC: 37.16,14.666 45,19.746
  rectangle net OUTA: 37.16,0.254 45,5.334
  rectangle net NetQ3_4: 35.179,0.279 36.83,1.473
  rectangle net NetQ3_3: 35.179,1.651 36.83,5.309
  rectangle net OUTA: 33.376,0.279 34.925,4.039
  rectangle net VCC_IN: 4.47,15.062 10.744,16.027
  rectangle net VCC_IN: 9.652,14.224 10.744,15.062
  rectangle net NetD1_2: 1.118,12.167 3.734,13.538
  rectangle net NetD1_2: 2.819,11.201 5.639,12.319
  rectangle net NetL1_1: 4.394,6.706 5.74,9.576
  rectangle net VP: 6.401,8.534 9.22,9.576
  rectangle net VP: 6.401,6.68 7.645,8.534
Mid-Layer 2:
  rectangle net NetQ3_3: 35.179,3.302 37.719,5.309
  rectangle net NetQ5_3: 35.179,10.414 37.719,12.497
  rectangle net NetQ8_3: 35.179,17.653 37.719,19.761
  rectangle net OUTA: 39.243,0.254 45,5.334
  rectangle net OUTB: 39.243,7.493 45,12.573
  rectangle net OUTC: 39.243,14.656 44.82,19.82
Mid-Layer 3:
  rectangle net OUTC: 39.243,14.666 45,19.812
  rectangle net OUTB: 39.243,7.493 45,12.573
  rectangle net OUTA: 39.116,0.18 45,5.334
  rectangle net NetQ3_3: 35.179,1.016 37.719,4.826
  rectangle net NetQ5_3: 35.179,9.017 37.719,12.497
  rectangle net NetQ8_3: 35.179,15.621 37.973,19.761
  rectangle net OUTA: 33.376,0.799 34.925,2.972
  rectangle net OUTB: 33.35,8.051 34.925,10.16
  rectangle net OUTC: 33.376,15.159 34.925,17.272
Bottom Layer:
  rectangle net NetQ8_3: 35.179,15.24 37.973,19.812
  rectangle net NetQ5_3: 35.179,8.255 37.719,9.779
  rectangle net NetQ3_3: 35.179,1.016 37.719,3.429
  rectangle net NetQ2_4: 33.376,4.826 34.163,5.563
  rectangle net NetQ4_4: 33.401,11.811 34.925,12.563
  rectangle net NetQ6_4: 33.401,18.923 34.925,19.685
  region net GND: 26.1,12.254 27.357,10.997 30.988,14.627 29.731,15.884
  rectangle net NetQ8_3: 35.179,16.002 37.719,19.761
  rectangle net OUTC: 33.376,14.722 34.925,17.272
  rectangle net OUTB: 33.35,7.722 34.925,10.16
  rectangle net OUTA: 33.376,0.825 34.925,2.972
  rectangle net NetQ3_3: 35.179,1.651 37.719,5.309

## Silkscreen, mask and mechanical layers (free items; w line width, h text height)
Top Overlay:
  text "+" at 5.334,15.748 h5.08
  text "s" at 2.921,5.842 h2.54
  text "--" at 4.826,4.445 h5.08 r270
  text "BOOT" at 14.097,1.905 h1.2
Bottom Solder:
  drawing of 1778 lines, arcs and shapes, not listed
  text "Designed by" at 19.038,5.622 h1.3